# Altium PCB RPD_top.PcbDoc
Units mm, origin at the board's own origin, x right, y up, seen from the top; angles counter-clockwise.
Board outline 100 x 100 mm, 4 copper layers (Top Layer, Internal Plane 1, Internal Plane 2, Bottom Layer), stack 0.462 mm thick; 57 components, 49 nets, 219 pads, 7 vias.
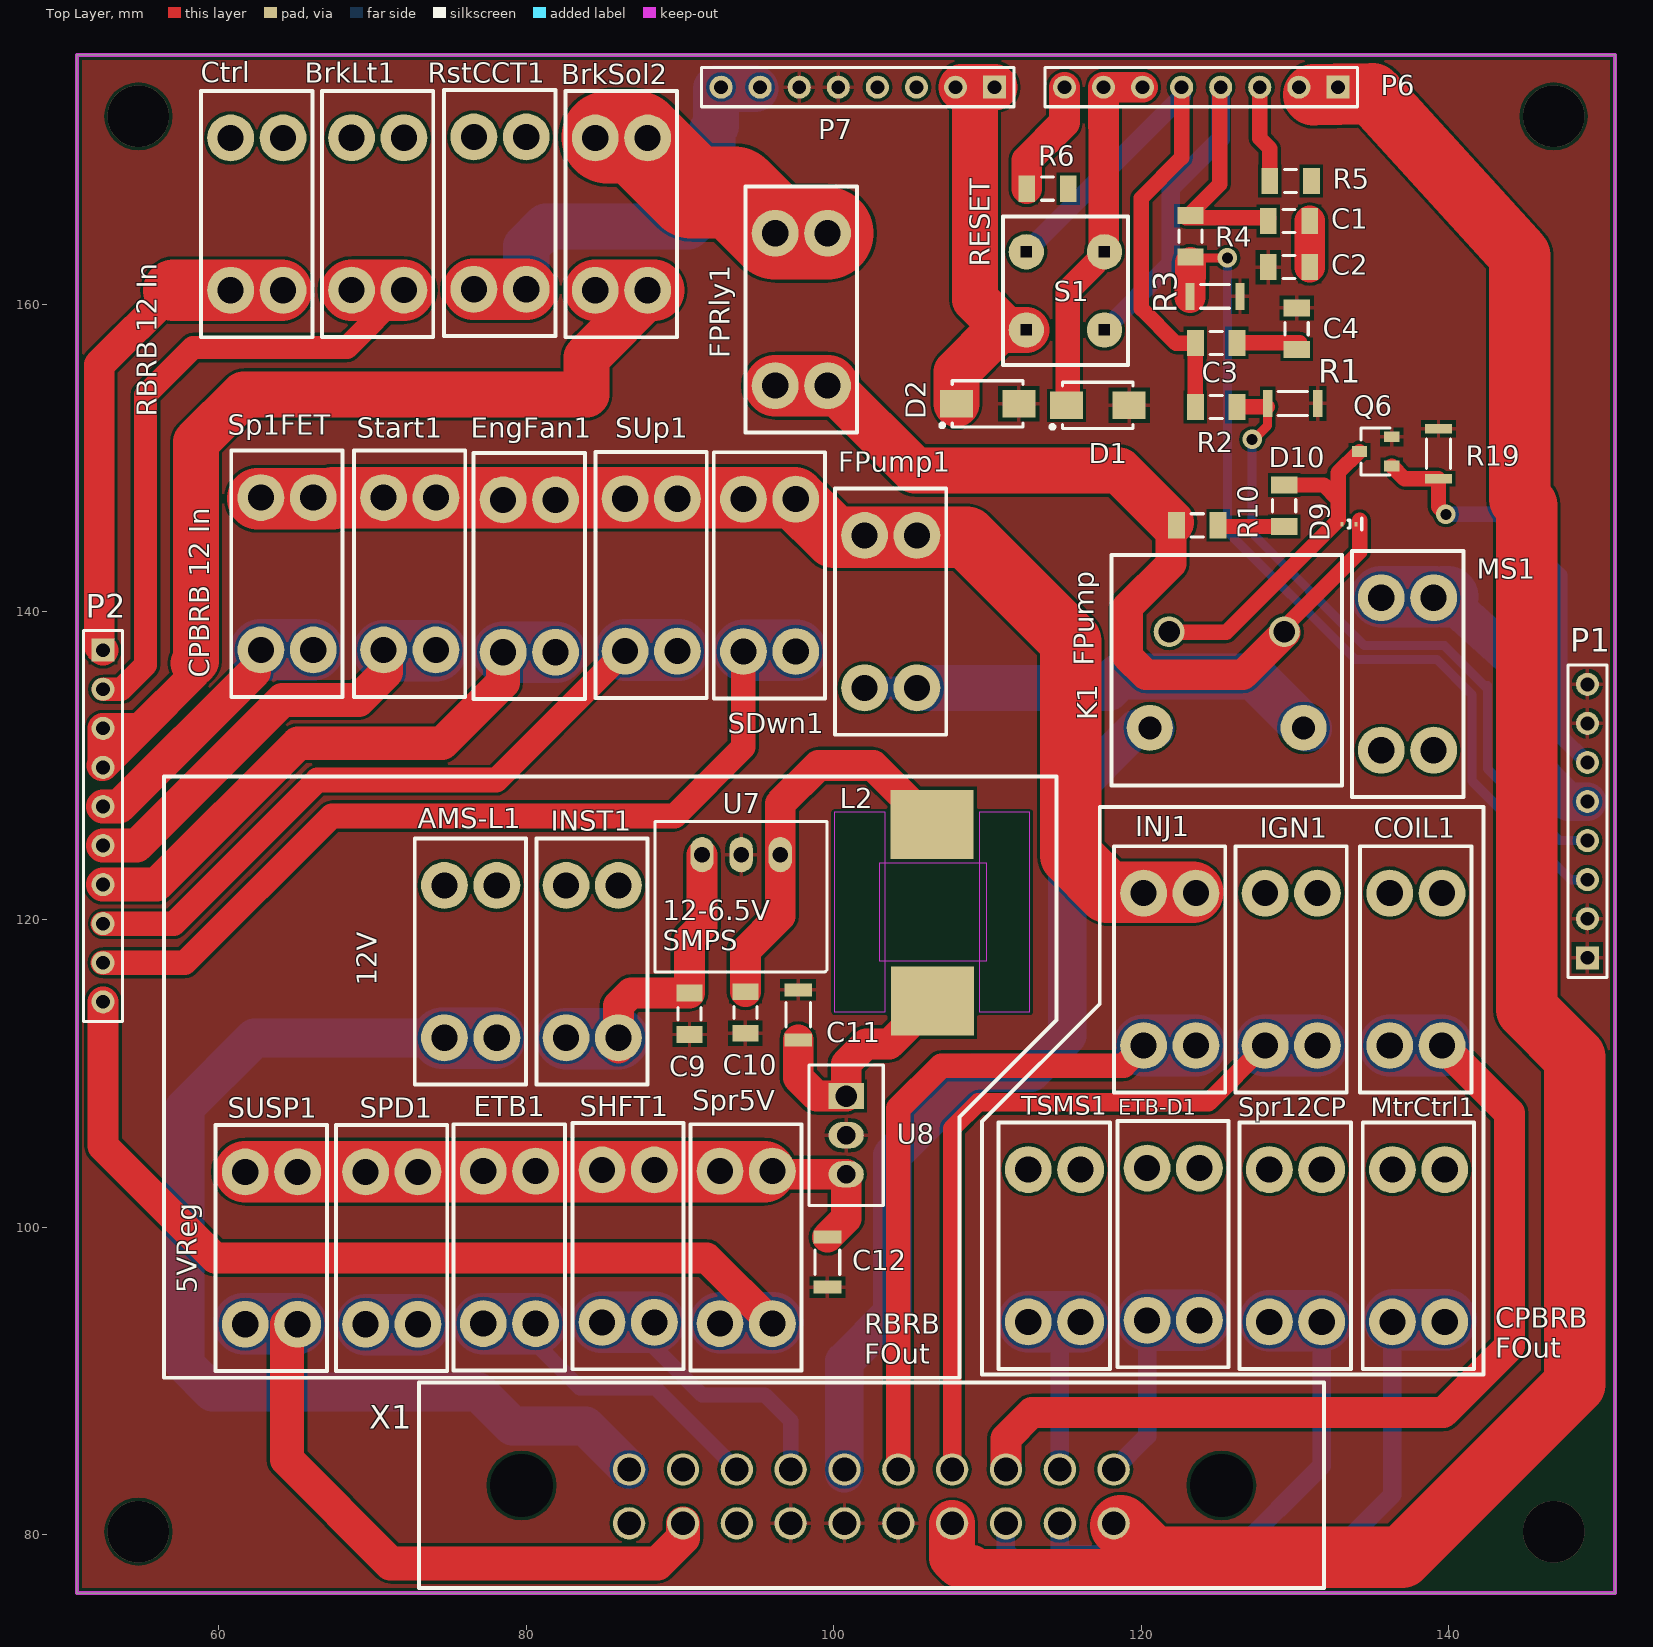
[diagram p0: Top Layer view]
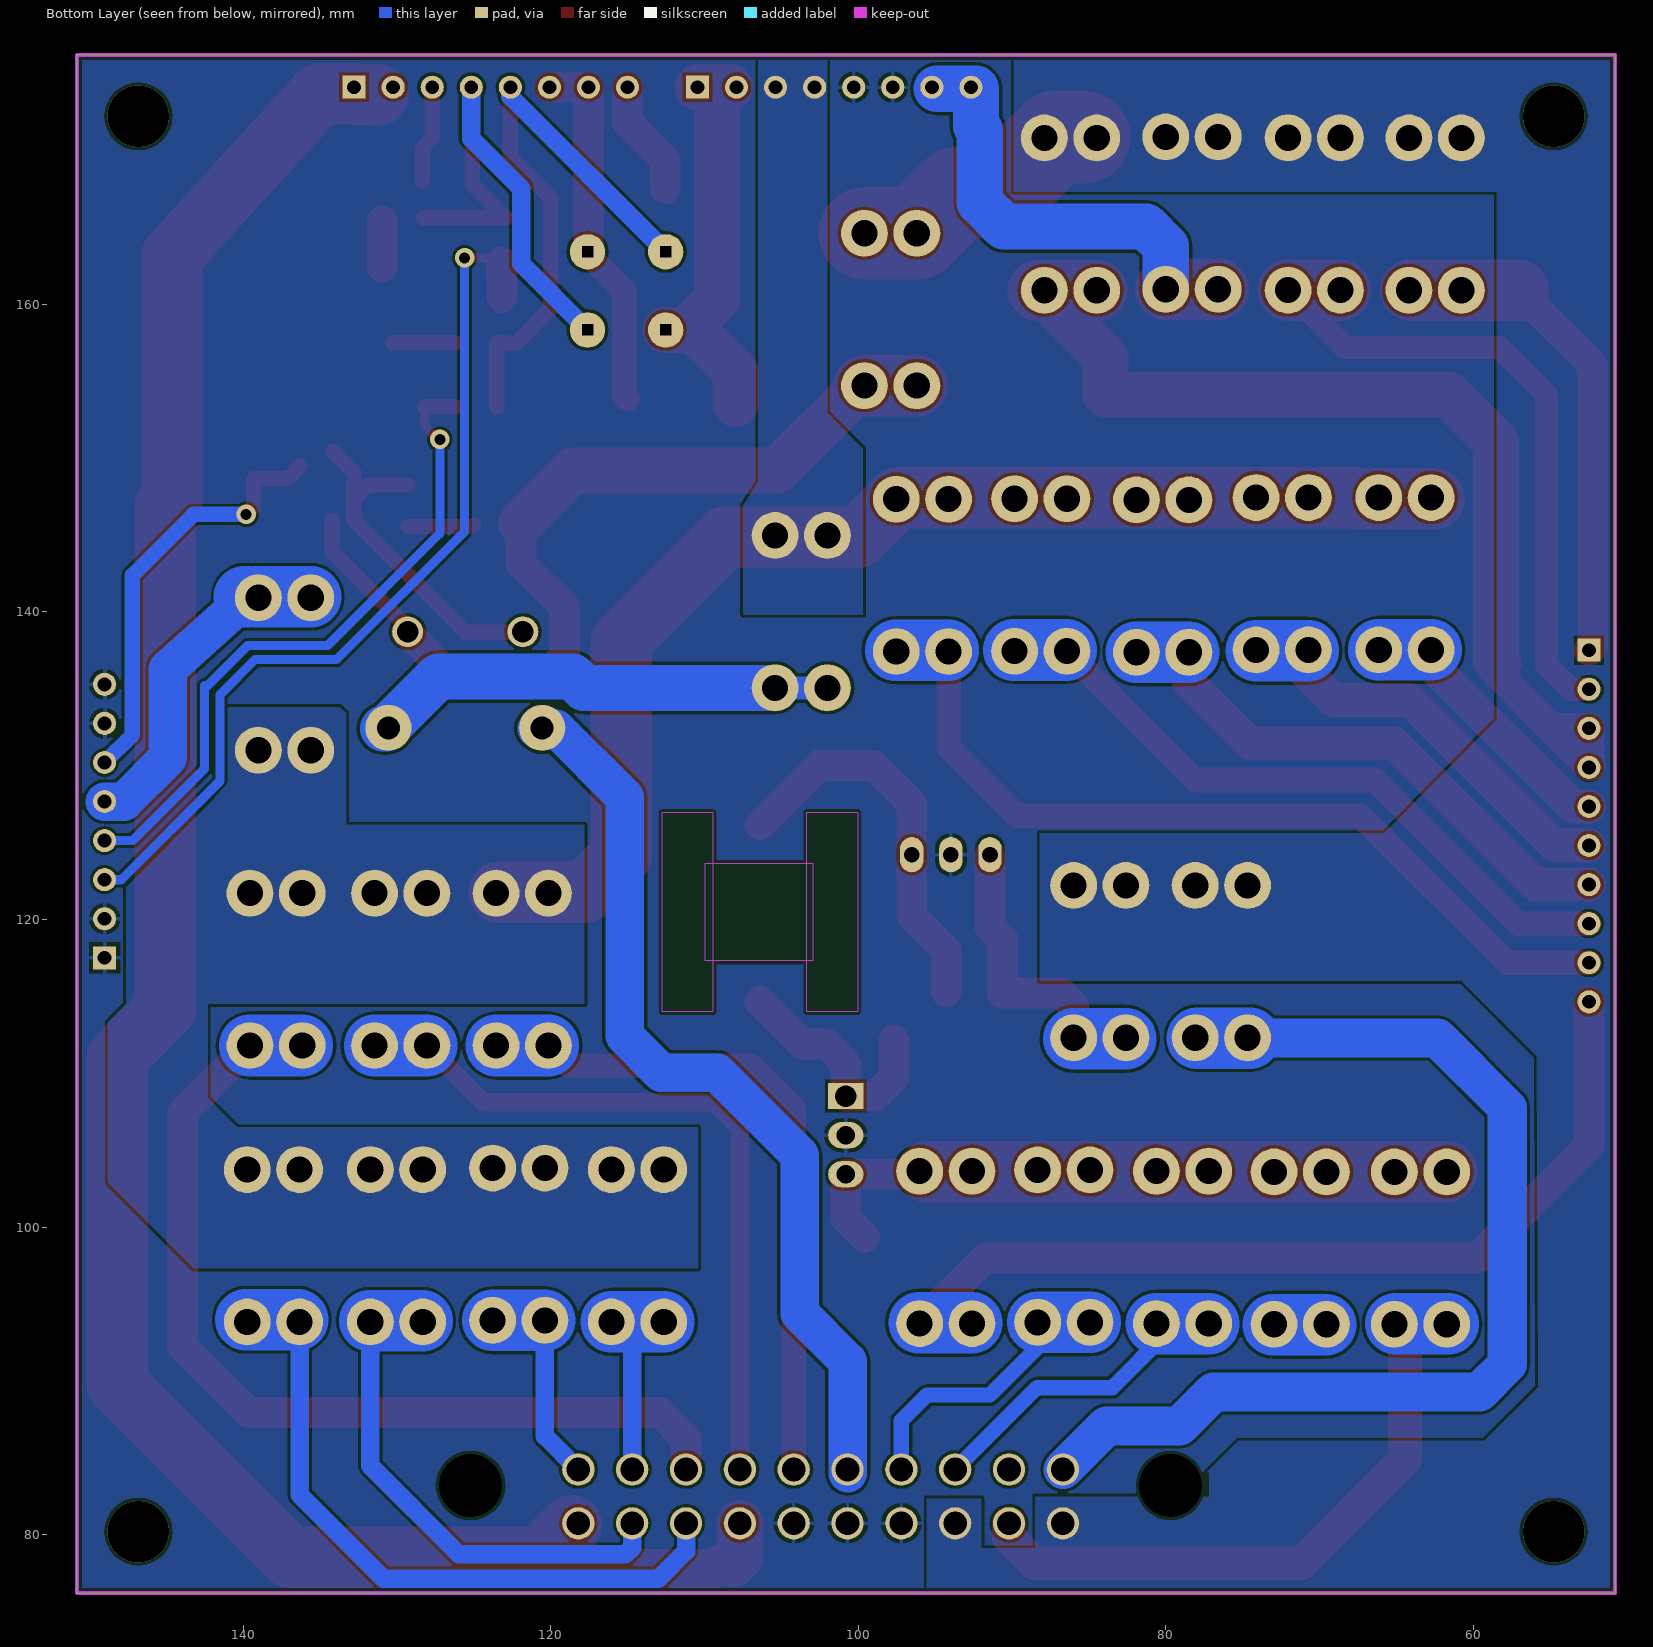
[diagram p1: Bottom Layer view, seen from below]
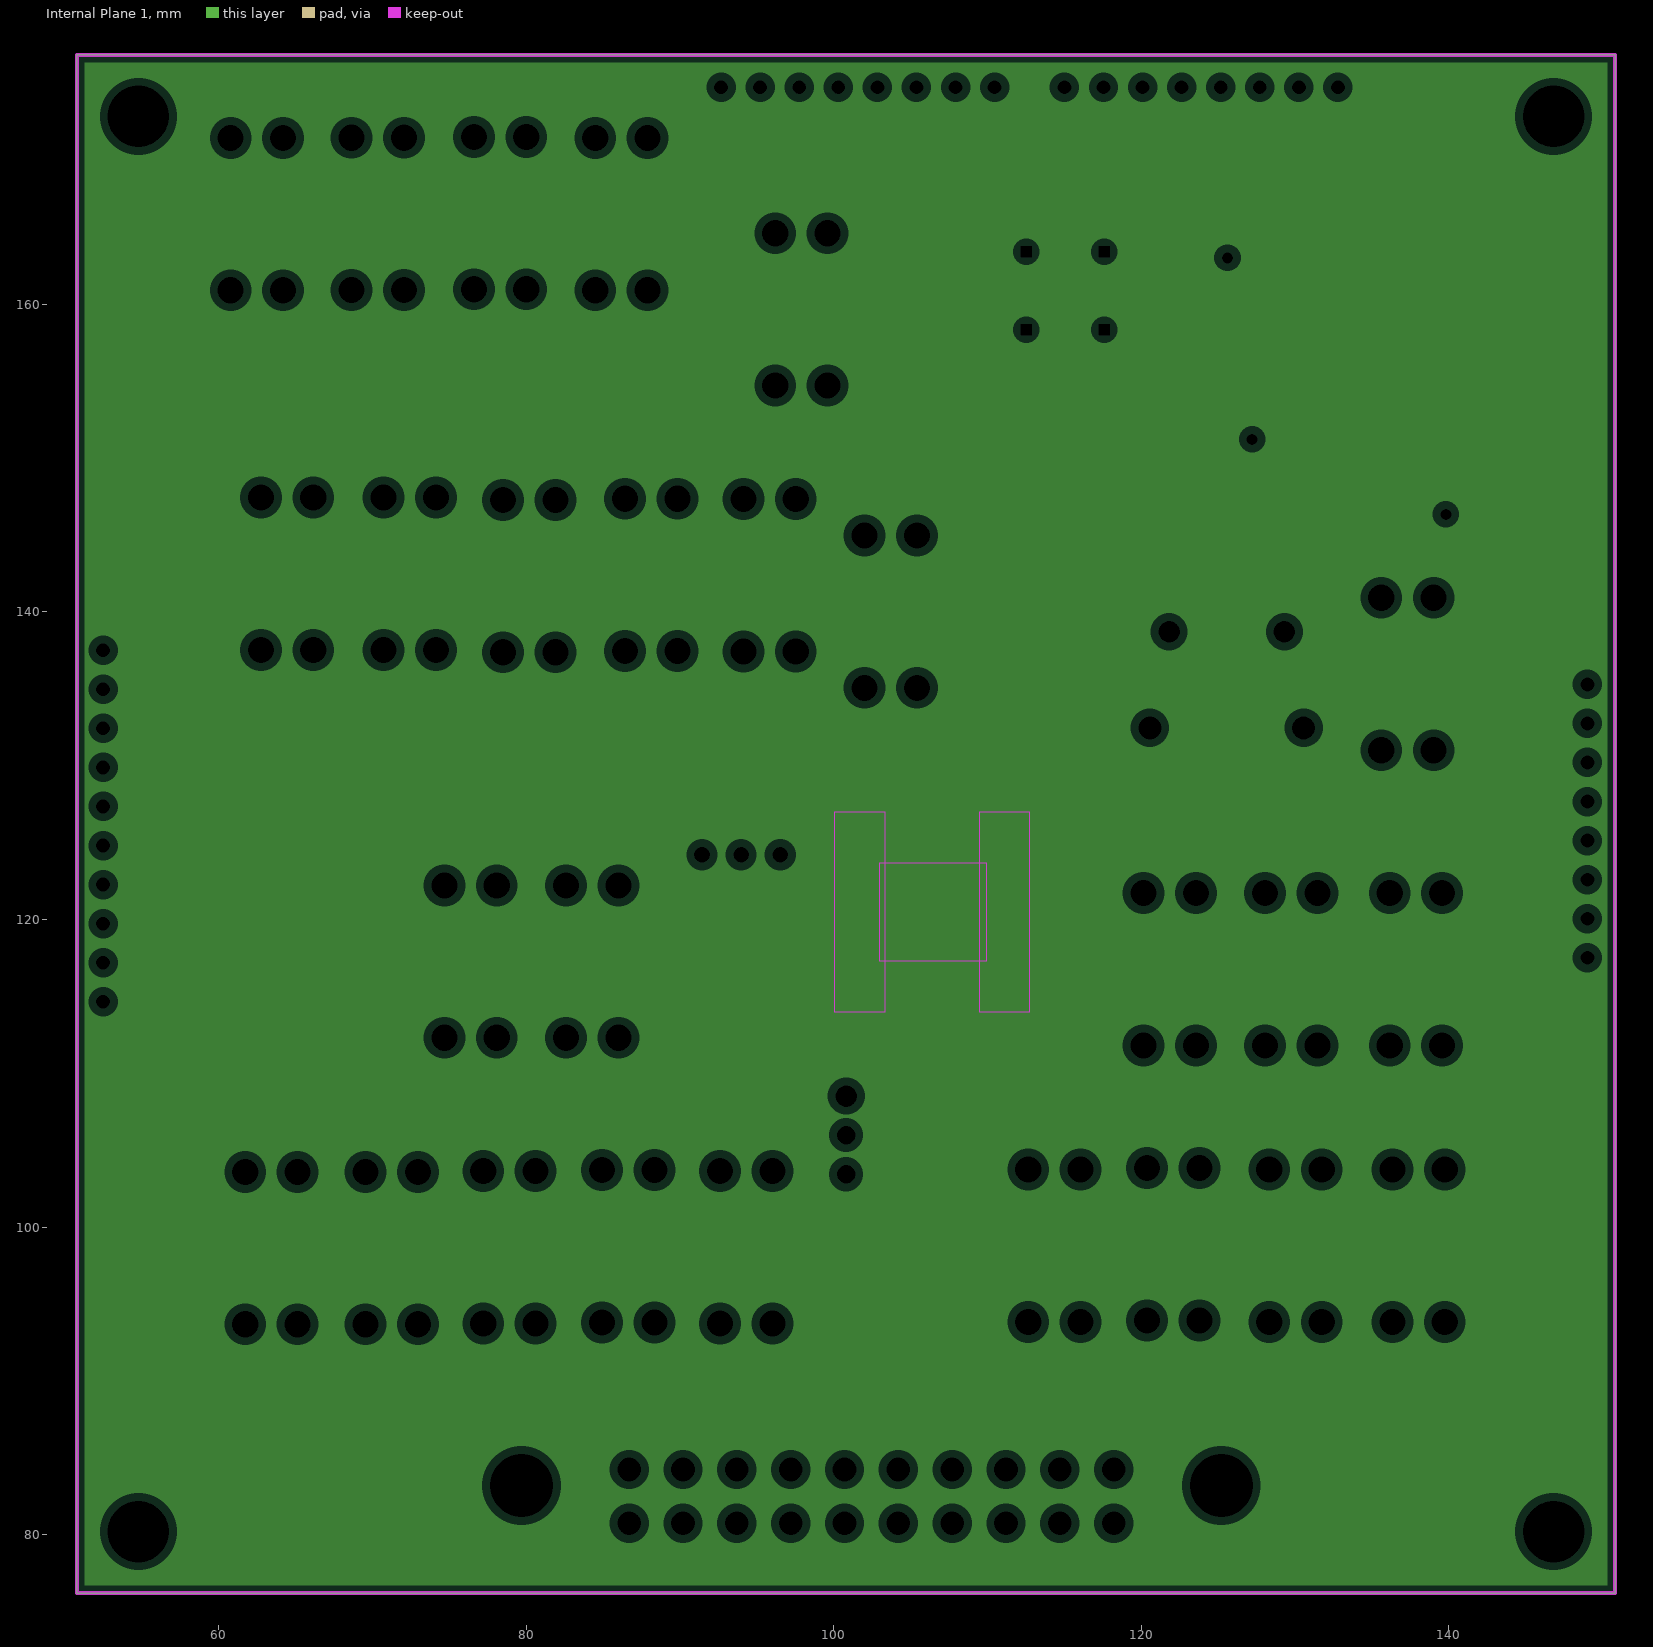
[diagram p2: Internal Plane 1, clearances drawn from the general rule]
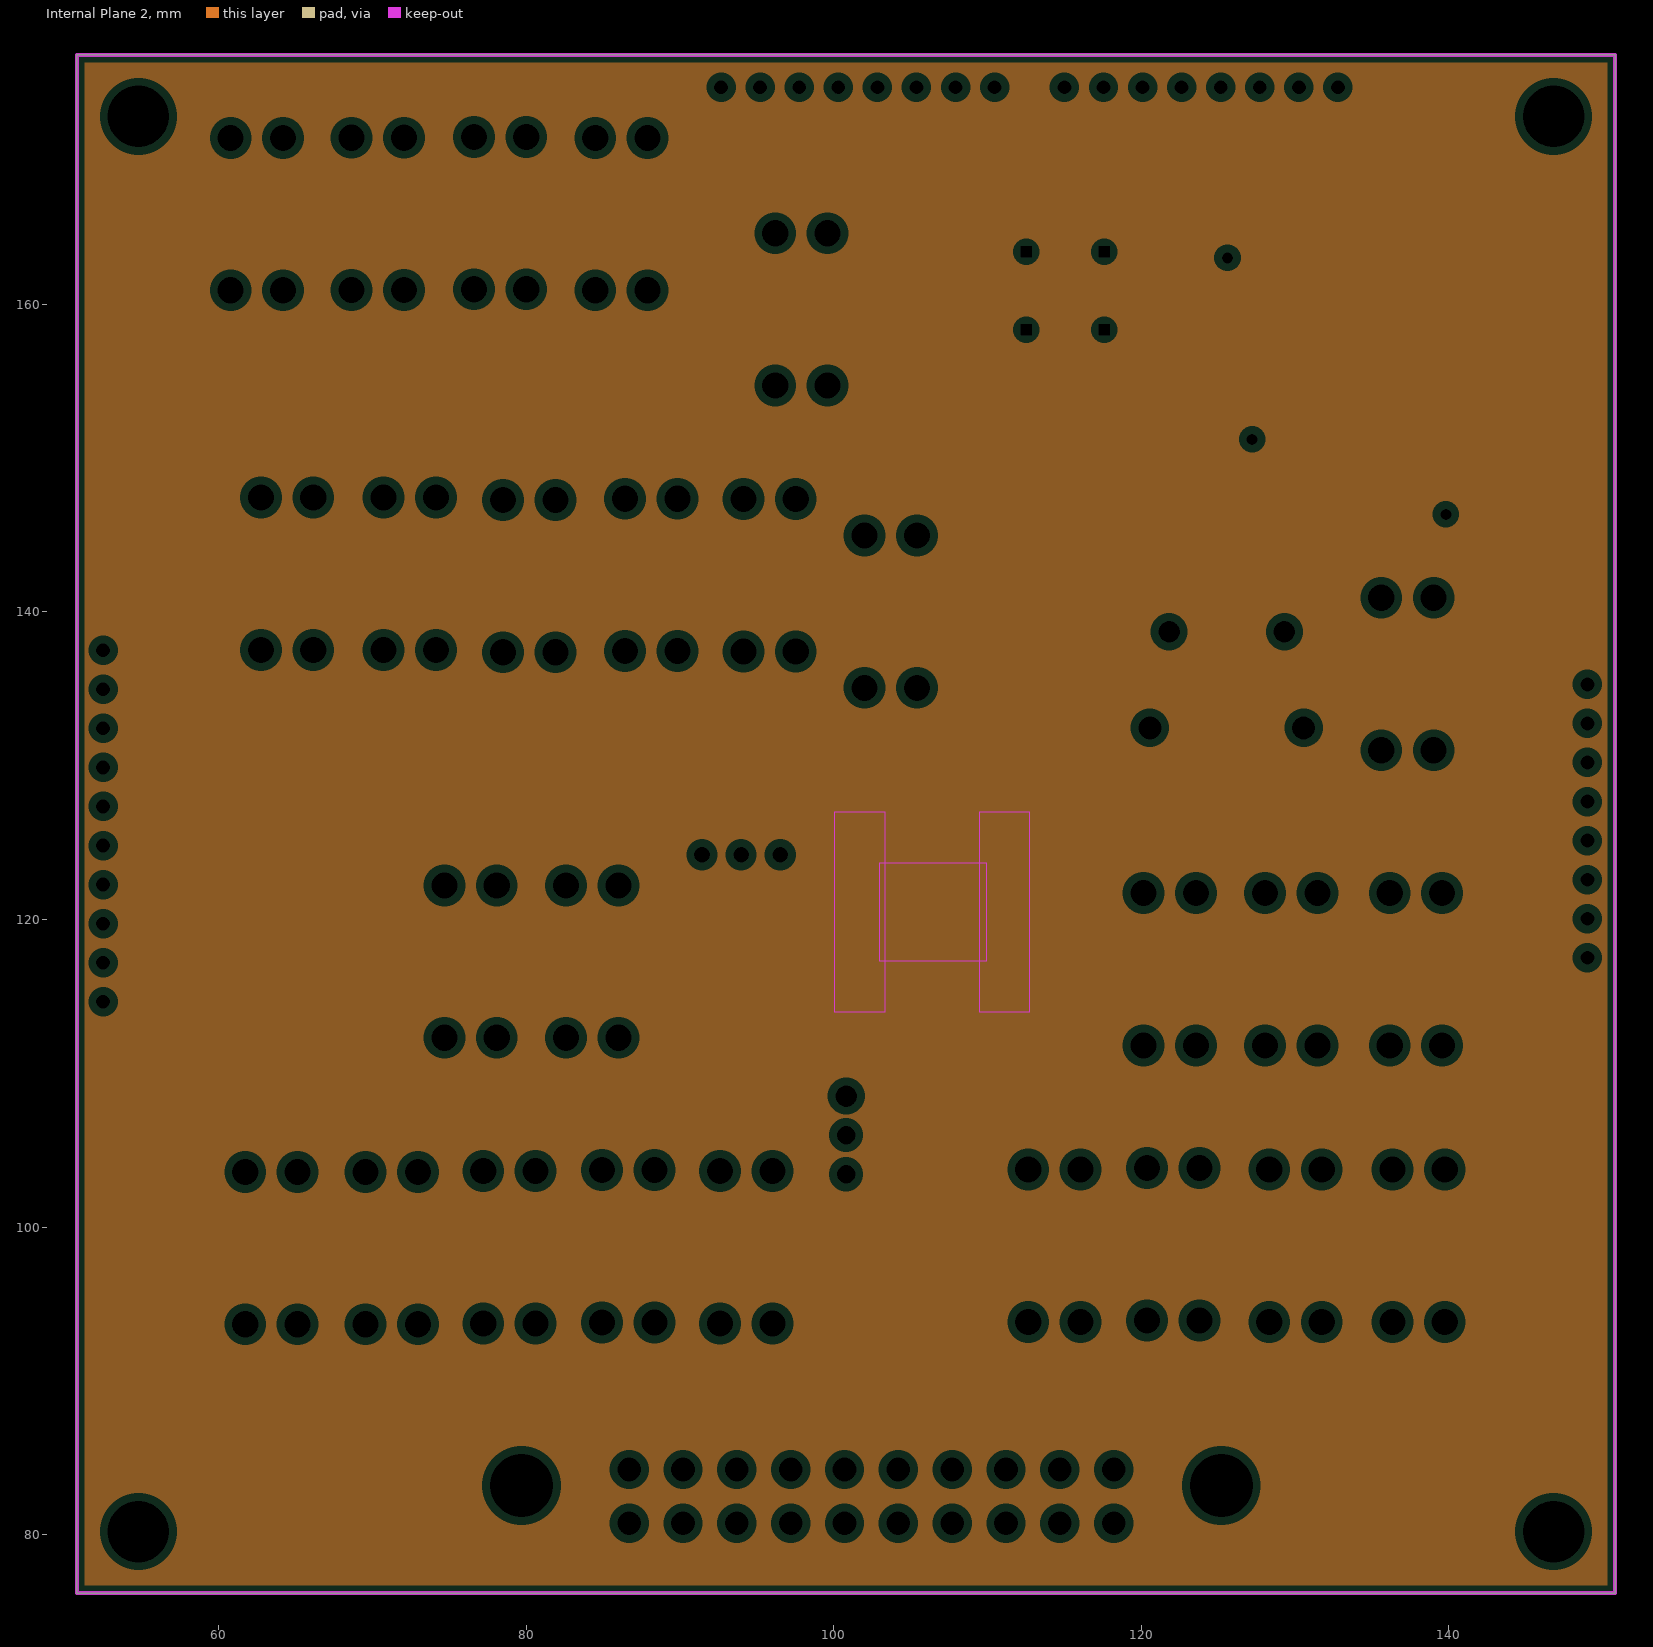
[diagram p3: Internal Plane 2, clearances drawn from the general rule]

## Layer stack, top to bottom
Top Solder: solder mask 0.0102, Solder Resist, Dk 3.5
Top Layer: signal copper 0.0356
Internal Plane 1: plane copper 0.0356
Internal Plane 2: plane copper 0.0356
Dielectric 1: dielectric 0.32, FR-4, Dk 4.8
Bottom Layer: signal copper 0.0356
Bottom Solder: solder mask 0.0102, Solder Resist, Dk 3.5

## Board outline
50.8,76.2 150.8,76.2 150.8,176.2 50.8,176.2

## Design rules (kind name [scope] priority, off if disabled: settings)
Clearance Clearance_1 [All] p1: gap=0.2 ignorepadtopadclearanceinfootprint=FALSE
Clearance [IsRegion vs IsRegion] p2: gap=0.3 ignorepadtopadclearanceinfootprint=FALSE
HoleSize [All] p1: absolutevalues=TRUE maxlimit=5 minlimit=0.025 maxpercent=80.000 minpercent=20.000
MinimumSolderMaskSliver [All] p1: minsoldermaskwidth=0.12
PlaneClearance [All] p1: clearance=0.508
PlaneConnect [All] p1: planeconnectstyle=Relief reliefexpansion=0.508 reliefentries=4 reliefconductorwidth=0.254 reliefairgap=0.254
PolygonConnect PolygonConnect_6 [All vs IsNamedPolygon('Bottom Layer-CPBRB')] p1: thpad.connectstyle=Direct thpad.reliefconductorwidth=0.254 thpad.reliefentries=4 thpad.polygonreliefangle="90 Angle" thpad.airgapwidth=0.254 smdpad.connectstyle=Relief smdpad.reliefconductorwidth=0.254 smdpad.reliefentries=4 smdpad.polygonreliefangle="90 Angle" smdpad.airgapwidth=0.254 via.connectstyle=Relief via.reliefconductorwidth=0.254 via.reliefentries=4 via.polygonreliefangle="90 Angle" via.airgapwidth=0.254
PolygonConnect PolygonConnect_5 [All vs IsNamedPolygon('CPBRB')] p2: thpad.connectstyle=Direct thpad.reliefconductorwidth=0.254 thpad.reliefentries=4 thpad.polygonreliefangle="90 Angle" thpad.airgapwidth=0.254 smdpad.connectstyle=Relief smdpad.reliefconductorwidth=0.254 smdpad.reliefentries=4 smdpad.polygonreliefangle="90 Angle" smdpad.airgapwidth=0.254 via.connectstyle=Relief via.reliefconductorwidth=0.254 via.reliefentries=4 via.polygonreliefangle="90 Angle" via.airgapwidth=0.254
PolygonConnect PolygonConnect_4 [All vs IsNamedPolygon('RBRB')] p3: thpad.connectstyle=Direct thpad.reliefconductorwidth=0.254 thpad.reliefentries=4 thpad.polygonreliefangle="90 Angle" thpad.airgapwidth=0.254 smdpad.connectstyle=Relief smdpad.reliefconductorwidth=0.254 smdpad.reliefentries=4 smdpad.polygonreliefangle="90 Angle" smdpad.airgapwidth=0.254 via.connectstyle=Relief via.reliefconductorwidth=0.254 via.reliefentries=4 via.polygonreliefangle="90 Angle" via.airgapwidth=0.254
PolygonConnect PolygonConnect_3 [All vs IsNamedPolygon('GND')] p4: connectstyle=Relief reliefconductorwidth=0.254 reliefentries=4 polygonreliefangle="90 Angle" airgapwidth=0.254
PolygonConnect PolygonConnect_2 [All] p5: connectstyle=Relief reliefconductorwidth=0.254 reliefentries=4 polygonreliefangle="90 Angle" airgapwidth=0.254
PolygonConnect PolygonConnect_1 [All] p6: connectstyle=Relief reliefconductorwidth=0.254 reliefentries=4 polygonreliefangle="90 Angle" airgapwidth=0.254
PolygonConnect [(InNet('RIGHT BRB'))] p7: connectstyle=Direct reliefconductorwidth=0.254 reliefentries=4 polygonreliefangle="90 Angle" airgapwidth=0.254
RoomDefinition FuelPump [InComponentClass('FuelPump')] p1 off: confinementstyle=ConfineIn formatcopy=TRUE lockcomponents=FALSE outline 0,0 50.8,0 50.8,25.4 0,25.4
RoomDefinition ResetCircuit [InComponentClass('ResetCircuit')] p2 off: confinementstyle=ConfineIn formatcopy=TRUE lockcomponents=FALSE outline 151.892,160.401 220.218,160.401 220.218,204.089 151.892,204.089
RoomDefinition Fusing_Connectors [InComponentClass('Fusing_Connectors')] p3 off: confinementstyle=ConfineIn formatcopy=TRUE lockcomponents=FALSE outline 151.892,77.724 588.01,77.724 588.01,139.7 151.892,139.7
RoutingVias [All] p1: holewidth=0.6 width=1 viastyle="Through Hole" minholewidth=0.711 minwidth=1.27 maxholewidth=0.711 maxwidth=1.27
SilkToSilkClearance [All] p1: silktosilkclearance=0.1
SilkToSolderMaskClearance [IsPad] p1: minsilkscreentomaskgap=0.12 clearancetoexposedcopper=TRUE
SolderMaskExpansion [All] p1: expansion=0.102
Width Width_1 [All] p1: maxlimit=6 minlimit=0.5 preferedwidth=1.2
Width Width_2 [InNet('CPBRB')] p2: maxlimit=4 minlimit=3 preferedwidth=4
Width [InNet('RIGHT BRB')] p3: maxlimit=4 minlimit=3 preferedwidth=4
24 further rules are at their usual default settings.

## Classes and differential pairs
component class Fusing_Connectors: AMS-L1 BrkLt1 BrkSol2 C9 C10 C11 C12 COIL1 Ctrl EngFan1 ETB1 ETB-D1 FPRly1 FPump1 IGN1 INJ1 INST1 L2 MS1 MtrCtrl1 P1 P2 RstCCT1 SDwn1 SHFT1 Sp1FET SPD1 Spr5V Spr12CP Start1 SUp1 SUSP1 TSMS1 U7 U8 X1
component class FuelPump: D9 D10 K1 Q6 R10 R19
component class ResetCircuit: C1 C2 C3 C4 D1 D2 P6 P7 R1 R2 R3 R4 R5 R6 S1

## Components (designator, comment, footprint, x,y, rotation, side; value= is the part's Value field where it differs from the comment)
AMS-L1 "Fuse 2" "Fuse Holder Mini ATC/ATO"#1 78.1,112.3 r90 top
BrkLt1 "Fuse 2" "FUSE HOLDER MINI ATC/ATO" 72.06,160.909 r90 top
BrkSol2 "Fuse 2" "FUSE HOLDER MINI ATC/ATO" 87.904,160.894 r90 top
C1 "Cap" C1206 129.6,165.4 r180 top value=47uF
C2 "Cap" C1206 129.6,162.4 r0 top value=47uF
C3 "Cap" C1206 124.866,157.48 r180 top value=47uF
C4 "Cap" C1206 130.1,158.4 r270 top value=47uF
C9 "Cap2" C1206 90.627,113.868 r270 top value=10uF
C10 "Cap2" C1206 94.259,113.944 r270 top value=10uF
C11 "Cap2" 1206 97.688,113.792 r90 top value=22uF
C12 "Cap2" 1206 99.593,97.714 r270 top value=22uF
COIL1 "Fuse 4A" "Fuse Holder Mini ATC/ATO"#1 139.55,111.8 r90 top
Ctrl "Fuse 2" "FUSE HOLDER MINI ATC/ATO" 64.2,160.894 r90 top
D1 "Flyback" "DO-214AC, SMA" 117.17,153.416 r180 top
D2 "Flyback" "DO-214AC, SMA" 110.007,153.518 r180 top
D9 "Diode" 1SS413 133.945,145.694 r90 top
D10 "LED0" C1206 129.286,146.888 r90 top
EngFan1 "Fuse 2" "FUSE HOLDER MINI ATC/ATO" 81.915,137.363 r90 top
ETB1 "Fuse 2" "Fuse Holder Mini ATC/ATO"#1 80.62,93.726 r90 top
ETB-D1 "Fuse 5A" "Fuse Holder Mini ATC/ATO"#1 123.774,93.929 r90 top
FPRly1 "Fuse 2" "FUSE HOLDER MINI ATC/ATO" 99.6,154.7 r90 top
FPump1 "Fuse 2" "FUSE HOLDER MINI ATC/ATO" 105.41,135.052 r90 top
IGN1 "Fuse 10A" "Fuse Holder Mini ATC/ATO"#1 131.45,111.8 r90 top
INJ1 "Fuse 4A" "Fuse Holder Mini ATC/ATO"#1 123.55,111.8 r90 top
INST1 "Fuse 2" "Fuse Holder Mini ATC/ATO"#1 86.004,112.3 r90 top
K1 "Relay-SPST" PB114012 125.55,133.7 r270 top
L2 "Inductor" "FILTER INDUCTOR" 106.401,125.425 r0 top value=20uH
MS1 "Fuse 2" "FUSE HOLDER MINI ATC/ATO" 135.6,140.906 r270 top
MtrCtrl1 "Fuse 2A" "Fuse Holder Mini ATC/ATO"#1 139.725,93.828 r90 top
P1 "Header 8" HDR1X8 149,117.5 r90 top locked
P2 "Header 10" HDR1X10 52.5,137.5 r270 top locked
P6 "Header 8" HDR1X8 132.78,174.1 r180 top
P7 "Header 8" HDR1X8 110.46,174.1 r180 top
Q6 "MOSFET-N" SOT23f 135.23,150.419 r180 top
R1 "1206" "1206 (High Density)" 129.845,153.543 r180 top value=1M
R2 "Res1" C1206 124.866,153.314 r0 top value=100K
R3 "1206" "1206 (High Density)" 124.79,160.503 r180 top value=1M
R4 "Res1" C1206 123.2,164.4 r270 top value=100K
R5 "Blue LED Resistor" C1206 129.7,168 r180 top value=453R
R6 "Red LED Resistor" C1206 113.9,167.5 r180 top value=453R
R10 "1206" C1206 123.643,145.618 r0 top value=500
R19 "1206" "1206 (High Density)" 139.319,150.266 r270 top value=1M
RstCCT1 "Fuse 2" "FUSE HOLDER MINI ATC/ATO" 80.01,160.96 r90 top
S1 "SW-DP-PB" SW-DP-PB 115.062,160.858 r90 top
SDwn1 "Fuse 2" "FUSE HOLDER MINI ATC/ATO" 97.536,137.414 r90 top
SHFT1 "Fuse 2" "FUSE HOLDER MINI ATC/ATO" 88.341,93.802 r90 top
Sp1FET "Fuse 2" "FUSE HOLDER MINI ATC/ATO" 66.167,137.516 r90 top
SPD1 "Fuse 2" "Fuse Holder Mini ATC/ATO"#1 72.974,93.675 r90 top
Spr5V "Fuse 2" "Fuse Holder Mini ATC/ATO"#2 96.012,93.726 r90 top
Spr12CP "Fuse 2" "Fuse Holder Mini ATC/ATO"#1 131.724,93.828 r90 top
Start1 "Fuse 2" "FUSE HOLDER MINI ATC/ATO" 74.143,137.516 r90 top
SUp1 "Fuse 2" "FUSE HOLDER MINI ATC/ATO" 89.84,137.439 r90 top
SUSP1 "Fuse 2" "Fuse Holder Mini ATC/ATO"#1 65.151,93.675 r90 top
TSMS1 "AMS contactor side 7.5A" "Fuse Holder Mini ATC/ATO"#1 116.053,93.828 r90 top
U7 "6.5V SMPS" V7806-1000 93.98,124.206 r0 top
U8 "5V LIN REG" TO-220-3 100.813,105.969 r270 top
X1 "MX150-20" "20 Pin MX150" 79.7,83.2 r0 top locked

## Footprints (in the part's own frame and the unit in brackets; to place one, negate y for a bottom-side part, rotate by r counter-clockwise, add the part's x,y. Pads: shape width x height; smd on the part's side, far side on the other; paste and mask are expansions set on the pad)
1SS413 [mm] "2-SMD DIODE FOR RELAY COIL FLYBACK"
  rect 0.3x0.2 smd: 1(0,0.9) 2(0,0)
  silkscreen extent -0.38,-0.38 0.38,0.51
"20 Pin MX150" [mm]
  round 2.1 hole 1.54: 1(7,1.04) 2(10.5,1.04) 3(14,1.04) 4(17.5,1.04) 5(21,1.04) 6(24.5,1.04) 7(28,1.04) 8(31.5,1.04) 9(35,1.04) 10(38.5,1.04) 11(7,-2.46) 12(10.5,-2.46) 13(14,-2.46) 14(17.5,-2.46) 15(21,-2.46) 16(24.5,-2.46) 17(28,-2.46) 18(31.5,-2.46) 19(35,-2.46) 20(38.5,-2.46)
  round 0 hole 4.1 unplated: 30(0,0) 31(45.5,0)
  silkscreen extent -6.67,-6.68 52.17,6.68
1206 [mm] "Chip Capacitor, 2-Leads, Body 3.20x1.60mm, IPC Medium Density"
  rect 0.85x1.8 smd: 1(-1.625,0) 2(1.625,0)
  silkscreen extent -0.8,-0.8 0.8,0.8, body extent -1.7,-0.9 1.7,0.9, height 0.6
"1206 (High Density)" [mm] "Panasonic 1206 Resistor"
  rect 0.6x1.75 smd: 1(-1.625,0) 2(1.625,0)
  silkscreen extent -0.95,-0.77 0.95,0.77, body extent -1.5,-0.72 1.5,0.72, height 0.7
C1206 [mm] "Chip Capacitor, Body 3.2x1.6mm, IPC High Density"
  rect 1.1x1.7 smd: 1(-1.35,0) 2(1.35,0)
  silkscreen extent -0.4,-0.75 0.4,0.75, body extent -1.7,-0.9 1.7,0.9, height 1.3
"DO-214AC, SMA" [mil]
  rect 85x70 smd: 1(-80,0) 2(80,0)
  silkscreen extent -91,-59 121,60, body extent -91,-57 91,57, height 96
"FILTER INDUCTOR" [mm]
  rect 5.4x4.5 smd: 1(0,0.74) 2(0.01,-10.73)
  Keep-Out Layer region: -3.429,-8.128 3.556,-8.128 3.556,-1.778 -3.429,-1.778
  Keep-Out Layer region: 3.048,-11.43 6.35,-11.43 6.35,1.524 3.048,1.524
  Keep-Out Layer region: -6.35,-11.43 -3.048,-11.43 -3.048,1.524 -6.35,1.524
"Fuse Holder Mini ATC/ATO"#1 [mil] "BK-6010"
  round 120 hole 67: 1(0,134) 1(0,0) 2(390,0) 2(390,134)
  silkscreen extent -120,-75 510,210, body extent -120,-75 510,210, height 290
"Fuse Holder Mini ATC/ATO"#2 [mil] "BK-6010"
  round 120 hole 67: 1(0,134) 1(0,0) 2(390,134)
  round 120 hole 67 mask+4: 2(390,0)
  silkscreen extent -120,-75 510,210, body extent -120,-75 510,210, height 290
"FUSE HOLDER MINI ATC/ATO" [mil] "BK-6010"
  round 120 hole 67: 1(0,134) 1(0,0) 2(390,0) 2(390,134)
  silkscreen extent -120,-75 510,210, body extent -120,-75 510,210, height 290
HDR1X8 [mm] "Connector; Header; 8 Position"
  rect 1.5x1.5 hole 0.9: 1(0,0)
  round 1.5 hole 0.9: 2(2.54,0) 3(5.08,0) 4(7.62,0) 5(10.16,0) 6(12.7,0) 7(15.24,0) 8(17.78,0)
  silkscreen extent -1.27,-1.27 19.05,1.27
HDR1X10 [mm] "Connector; Header; 10 Position"
  rect 1.5x1.5 hole 0.9: 1(0,0)
  round 1.5 hole 0.9: 2(2.54,0) 3(5.08,0) 4(7.62,0) 5(10.16,0) 6(12.7,0) 7(15.24,0) 8(17.78,0) 9(20.32,0) 10(22.86,0)
  silkscreen extent -1.27,-1.27 24.13,1.27
PB114012 [mm] "Relay"
  round 3 hole 1.5: 1(1.25,5) 2(1.25,-5)
  round 2 hole 1.4: 3(-5,3.75) 4(-5,-3.75)
  silkscreen extent -10,-7.5 5,7.5
SOT23f [mm] "SOT23, 3-Leads, Body 2.90x2.40mm, Pitch 0.95mm, IPC Medium Density"
  rect 1x0.7 smd: 1(1.05,0) 2(-1.05,0.95) 3(-1.05,-0.95)
  silkscreen extent -0.92,-1.52 0.95,1.52
SW-DP-PB [mm] "Double Pole Push Button for Reset Circuit"
  round 2.3 hole 0.711 square: 1(2.54,-2.54) 3(2.54,2.54) 4(-2.54,-2.54) 6(-2.54,2.54)
  silkscreen extent -4.83,-4.06 4.83,4.06
TO-220-3 [mm] "LM2940CT 5V LINEAR REG"
  rect 1.7x2.286 hole 1.4: 1(-2.54,0)
  oval 1.7x2.286 hole 1.2: 2(0,0) 3(2.54,0)
  silkscreen extent -4.57,-2.41 4.57,2.41
V7806-1000 [mil] "6.5V output SMPS"
  oval 60x90 hole 40: 1(-100,0) 2(0,0) 3(100,0)
  silkscreen extent -220,-300 220,85

## Part data
AMS-L1 BrkLt1 BrkSol2 Ctrl EngFan1 ETB1 FPump1 INST1 RstCCT1 SDwn1 SHFT1 Sp1FET SPD1 Spr5V Start1 SUp1 SUSP1: "Fuse", Supplier Part Number 1=36-3568-ND, LatestRevisionDate=17-Jul-2002, LatestRevisionNote="Re-released for DXP Platform.", PackageDescription="Thru-Hole; 2 Leads", PackageReference=PIN-W2/E2.8, Published=8-Jun-2000, Publisher="Altium Limited", Supplier 1=Digi-Key
  AMS-L1 ETB1 INST1 SHFT1 SPD1 Spr5V SUSP1: Supplier 2=Digi-Key
C1 C2 C3 C4: "Capacitor", Supplier Part Number 1=587-5425-1-ND, LatestRevisionDate=17-Jul-2002, LatestRevisionNote="Re-released for DXP Platform.", PackageDescription="Radial Cap, Thru-Hole; 2 Leads; 0.3 in Pin Spacing", PackageReference=RAD-0.3, Published=8-Jun-2000, Publisher="Altium Limited"
  C3 C4: Supplier 1=Digikey
C9: "Capacitor. Ceramic 10uF 50V rating recommended, place close to pin", Supplier Part Number 1=478-8496-1-ND, PackageDescription="Capacitor; 2 Leads", PackageReference=CAPR5-4X5, Published=23-Sep-2002, Publisher="Altium Limited", Supplier 1=Digi-Key
C10: "Capacitor. Ceramic 10uF 16V recommended. place close to pin", Supplier Part Number 1=478-8496-1-ND, PackageDescription="Capacitor; 2 Leads", PackageReference=CAPR5-4X5, Published=23-Sep-2002, Publisher="Altium Limited", Supplier 1=Digi-Key
C11 C12: "Capacitor", Supplier Part Number 1=478-8468-1-ND, PackageDescription="Capacitor; 2 Leads", PackageReference=CAPR5-4X5, Published=23-Sep-2002, Publisher="Altium Limited", Supplier 1=Digi-Key
COIL1: library part "Fuse 2", "Fuse Ignition Coil 4A", Supplier Part Number 1=36-3568-ND, LatestRevisionDate=17-Jul-2002, LatestRevisionNote="Re-released for DXP Platform.", PackageDescription="Thru-Hole; 2 Leads", PackageReference=PIN-W2/E2.8, Published=8-Jun-2000, Publisher="Altium Limited", Supplier 1=Digi-Key, Supplier 2=Digi-Key
D1 D2: library part Diode, "Default Diode", Supplier Part Number 1=B160-FDICT-ND, Code_JEDEC=DO-214-AB, LatestRevisionDate=17-Jul-2002, LatestRevisionNote="Re-released for DXP Platform.", PackageDescription="DO-214-AB/SMC; 2 C-Bend Leads; Body 7.9 x 5.9 mm, inc. leads (LxW)", PackageReference=SMC, PackageVersion=Sep-1996, Published=8-Jun-2000, Publisher="Altium Limited", Supplier 1=Digi-Key
D9: "Switching diode", Supplier Part Number 1=1SS413L3FCT-ND, Code_JEDEC=DO-214-AB, LatestRevisionDate=17-Jul-2002, LatestRevisionNote="Re-released for DXP Platform.", PackageDescription="DO-214-AB/SMC; 2 C-Bend Leads; Body 7.9 x 5.9 mm, inc. leads (LxW)", PackageReference=SMC, PackageVersion=Sep-1996, Published=8-Jun-2000, Publisher="Altium Limited", Supplier 1=Digi-Key
D10: "Typical INFRARED GaAs LED", Supplier Part Number 1=1516-1172-1-ND, LatestRevisionDate=08-Jul-2005, LatestRevisionNote="Mech Layer 1 removed.", PackageDescription="LED; 2 Leads", PackageReference=LED-0, Published=8-Jun-2000, Publisher="Altium Limited", Supplier 1=Digi-Key
ETB-D1: library part "Fuse 2", "Fuse 5A ETB driver", Supplier Part Number 1=36-3568-ND, LatestRevisionDate=17-Jul-2002, LatestRevisionNote="Re-released for DXP Platform.", PackageDescription="Thru-Hole; 2 Leads", PackageReference=PIN-W2/E2.8, Published=8-Jun-2000, Publisher="Altium Limited", Supplier 1=Digi-Key, Supplier 2=Digi-Key
FPRly1: "Fuse Relay Coils", Supplier Part Number 1=36-3568-ND, LatestRevisionDate=17-Jul-2002, LatestRevisionNote="Re-released for DXP Platform.", PackageDescription="Thru-Hole; 2 Leads", PackageReference=PIN-W2/E2.8, Published=8-Jun-2000, Publisher="Altium Limited", Supplier 1=Digi-Key
IGN1: library part "Fuse 2", "Fuse 10A ignition", Supplier Part Number 1=36-3568-ND, LatestRevisionDate=17-Jul-2002, LatestRevisionNote="Re-released for DXP Platform.", PackageDescription="Thru-Hole; 2 Leads", PackageReference=PIN-W2/E2.8, Published=8-Jun-2000, Publisher="Altium Limited", Supplier 1=Digi-Key, Supplier 2=Digi-Key
INJ1: library part "Fuse 2", Supplier Part Number 1=36-3568-ND, LatestRevisionDate=17-Jul-2002, LatestRevisionNote="Re-released for DXP Platform.", PackageDescription="Thru-Hole; 2 Leads", PackageReference=PIN-W2/E2.8, Published=8-Jun-2000, Publisher="Altium Limited", Supplier 1=Digi-Key, Supplier 2=Digi-Key
K1: "Single-Pole Single-Throw Relay", Supplier Part Number 1=PB768-ND, LatestRevisionDate=17-Jul-2002, LatestRevisionNote="Re-released for DXP Platform.", PackageReference=MODULE4, Published=24-Mar-1999, Publisher="Altium Limited", Supplier 1=Digi-Key
L2: Supplier Part Number 1=732-1242-1-ND, Code_IEC=1005, Code_JEITA=0402, LatestRevisionDate=29-May-2009, LatestRevisionNote="IPC-7351 Footprint Added.", PackageDescription="Chip Inductor", PackageReference=0402-A, Published=8-Jun-2000, Publisher="Altium Limited", Supplier 1=Digi-Key
MS1: "Microsquirt fuse", Supplier Part Number 1=36-3568-ND, LatestRevisionDate=17-Jul-2002, LatestRevisionNote="Re-released for DXP Platform.", PackageDescription="Thru-Hole; 2 Leads", PackageReference=PIN-W2/E2.8, Published=8-Jun-2000, Publisher="Altium Limited", Supplier 1=Digi-Key
MtrCtrl1: library part "Fuse 2", "Fuse 2A Motor Controller", Supplier Part Number 1=36-3568-ND, LatestRevisionDate=17-Jul-2002, LatestRevisionNote="Re-released for DXP Platform.", PackageDescription="Thru-Hole; 2 Leads", PackageReference=PIN-W2/E2.8, Published=8-Jun-2000, Publisher="Altium Limited", Supplier 1=Digi-Key, Supplier 2=Digi-Key
P1: "Header, 8-Pin", Supplier Part Number 1=952-2121-ND, LatestRevisionDate=17-Jul-2002, LatestRevisionNote="Re-released for DXP Platform.", Publisher="Altium Limited", Supplier 1=Digi-Key
P2: "Header, 10-Pin", Supplier Part Number 1=952-2121-ND, LatestRevisionDate=17-Jul-2002, LatestRevisionNote="Re-released for DXP Platform.", Publisher="Altium Limited"
P6: "Header, 8-Pin, A98338-ND", Supplier Part Number 1=A98338-ND, LatestRevisionDate=17-Jul-2002, LatestRevisionNote="Re-released for DXP Platform.", Publisher="Altium Limited", Supplier 1=Digikey
P7: "Header, 8-Pin A98338-ND", Supplier Part Number 1=A98338-ND, LatestRevisionDate=17-Jul-2002, LatestRevisionNote="Re-released for DXP Platform.", Publisher="Altium Limited", Supplier 1=Digikey
Q6: "N-Channel MOSFET", Supplier Part Number 1=SSM3K329RLFCT-ND, LatestRevisionDate=17-Jul-2002, LatestRevisionNote="Re-released for DXP Platform.", PackageDescription="TO, Flat Index; 3 In-Line, Axial Leads; Body Dia. 4.6mm; Lead Dia. 0.5 mm (max)", PackageReference=E3, PackageVersion=1995/1996, Published=8-Jun-2000, Publisher="Altium Limited", Supplier 1=Digi-Key
R1 R3: library part Res1, "Resistor", Supplier Part Number 1=RG32P1.0MBCT-ND, LatestRevisionDate=17-Jul-2002, LatestRevisionNote="Re-released for DXP Platform.", PackageDescription="Axial Device, Thru-Hole; 2 Leads; 0.3 in Pin Spacing", PackageReference=AXIAL-0.3, Published=8-Jun-2000, Publisher="Altium Limited", Supplier 1=Digi-Key
R2 R4: "Resistor", Supplier Part Number 1=P100KBCCT-ND, LatestRevisionDate=17-Jul-2002, LatestRevisionNote="Re-released for DXP Platform.", PackageDescription="Axial Device, Thru-Hole; 2 Leads; 0.3 in Pin Spacing", PackageReference=AXIAL-0.3, Published=8-Jun-2000, Publisher="Altium Limited"
R5 R6: library part Res1, "Resistor", Supplier Part Number 1=RNCF1206BKE453RCT-ND, LatestRevisionDate=17-Jul-2002, LatestRevisionNote="Re-released for DXP Platform.", PackageDescription="Axial Device, Thru-Hole; 2 Leads; 0.3 in Pin Spacing", PackageReference=AXIAL-0.3, Published=8-Jun-2000, Publisher="Altium Limited", Supplier 1=Digi-Key
R10: library part Res1, "Resistor", Supplier Part Number 1=RNCP1206FTD511RCT-ND, LatestRevisionDate=17-Jul-2002, LatestRevisionNote="Re-released for DXP Platform.", PackageDescription="Axial Device, Thru-Hole; 2 Leads; 0.3 in Pin Spacing", PackageReference=AXIAL-0.3, Published=8-Jun-2000, Publisher="Altium Limited", Supplier 1=Digi-Key
R19: library part Res1, "Resistor", Supplier Part Number 1=RG3216P-1004-B-T1, LatestRevisionDate=17-Jul-2002, LatestRevisionNote="Re-released for DXP Platform.", PackageDescription="Axial Device, Thru-Hole; 2 Leads; 0.3 in Pin Spacing", PackageReference=AXIAL-0.3, Published=8-Jun-2000, Publisher="Altium Limited", Supplier 1=Digi-Key
S1: Supplier Part Number 1=CKN9865-ND, Supplier 1=Digikey
Spr12CP: "Spare Fuse", Supplier Part Number 1=36-3568-ND, LatestRevisionDate=17-Jul-2002, LatestRevisionNote="Re-released for DXP Platform.", PackageDescription="Thru-Hole; 2 Leads", PackageReference=PIN-W2/E2.8, Published=8-Jun-2000, Publisher="Altium Limited", Supplier 1=Digi-Key, Supplier 2=Digi-Key
TSMS1: library part "Fuse 2", "Fuse 7.5A", Supplier Part Number 1=36-3568-ND, LatestRevisionDate=17-Jul-2002, LatestRevisionNote="Re-released for DXP Platform.", PackageDescription="Thru-Hole; 2 Leads", PackageReference=PIN-W2/E2.8, Published=8-Jun-2000, Publisher="Altium Limited", Supplier 1=Digi-Key, Supplier 2=Digi-Key
U7: library part Component_1, Supplier Part Number 1=102-1716-ND, Supplier 1=Digi-Key
U8: library part Component_1, Supplier Part Number 1=LM2940CT-5.0/NOPB-ND, Supplier 1=Digi-Key
X1: library part "Header 10X2A", "Header, 10-Pin, Dual row", LatestRevisionDate=17-Jul-2002, LatestRevisionNote="Re-released for DXP Platform.", Publisher="Altium Limited"

## Via types
v1: diameter 4, hole 4, Top Layer to Bottom Layer, 4 vias
v2: diameter 1.27, hole 0.711, Top Layer to Bottom Layer, 3 vias

## Nets (pads, with @x,y where several pads share a name; then routed paths per layer and width w, separated by ;. In a path a pad name is that pad's centre, name@x,y a point inside that pad or via, vN(x,y) a via of type N, cw(c..) or ccw(c..) an arc to the next point about the centre after c; other vN are vias at no path point)
AMSFlyback: D1.2 P6.6 P6.7 S1.1 | length 22.9
  Top Layer w1.6: D1.2@115.037,153.822 115.214,154 115.214,160.858 S1.1@116.967,162.611
  Top Layer w2: S1.1@117.551,163.398 117.551,171.571 117.54,171.56 P6.7 P6.6
AMSLED: P6.3 R5.2 | length 6.4
  Top Layer w1: P6.3 127.7,170.765 128.35,170.115 R5.2
AMSStatus: C3.2 P6.5 R2.1 S1.3 | length 39
  Top Layer w1: P6.5 122.62,169.52 120,166.9 120,159.7 122.25,157.45 123.486,157.45 C3.2 R2.1
  Bottom Layer w1.2: S1.3 122.62,173.496 P6.5
CPBRB: COIL1.2 EngFan1.2 ETB-D1.2 FPump1.2 IGN1.2 INJ1.2 MS1.2 MtrCtrl1.2 P7.3 P7.4 SDwn1.2 Sp1FET.2 Spr12CP.2 Start1.2 SUp1.2 TSMS1.2 | length 79.6
  Top Layer w4: Sp1FET.2@62.56,147.345 67.399,147.345 67.475,147.422 70.739,147.422 74.143,147.422 81.915,147.422 93.022,147.422 97.434,147.422 97.536,147.32 100.025,144.831 108.647,144.831 115.4,138.078 115.4,124.173 117.795,121.778 INJ1.2@123.327,121.778
CPBRBIN: P6.1 P6.2 X1.17 X1.20 | length 142.9
  Top Layer w2.54: 109.017,78.054 109.274,77.797 119.986,77.797 120.726,78.537
  Top Layer w3: X1.17 107.7,78.507 108.153,78.054
  Top Layer w4: X1.20@118.669,80.594 120.726,78.537 133.166,78.537 136.937,78.537 148.184,89.784 148.184,111.023 145.059,114.148 145.059,146.895 144.602,147.352 144.602,163.156 135.025,173.674 132.787,173.642 132.718,173.641 131.198,173.619
GND: C2.1 C4.1 C9.2 C10.2 C11.2 C12.2 D1.1 D2.1 P1.1 P1.2 P1.7 P1.8 P7.5 P7.6 Q6.3 R1.1 R3.1 R19.1 U7.2 U8.2 X1.14 X1.15 X1.16
IMDFlyback: D2.2 P7.1 P7.2 S1.6 | length 25.2
  Top Layer w3: D2.2 107.975,155.575 110.718,158.318 111.176,158.318 ; P7.2@108.3,174.1 P7.1 ; 109.19,172.83 109.186,172.826 109.186,160.308 111.176,158.318 ; S1.6 111.176,158.318
IMDLED: P6.8 R6.2 | length 7.6
  Top Layer w2: R6.2 112.55,169.35 115,171.8 P6.8
IMDStatus: C1.2 P6.4 R4.1 S1.4 | length 33.7
  Top Layer w1: P6.4@125.1,174.1 125.1,167.8 122.9,165.6 C1.2@128.295,165.6
  Bottom Layer w1.2: S1.4 121.9,162.616 121.9,167.5 125.16,170.76 P6.4
NetAMS-L1_1: AMS-L1.1 X1.1 | length 70.4
  Bottom Layer w2.54: AMS-L1.1@74.552,112.284 62.347,112.284 57.81,107.747 57.81,91.084 59.614,89.281 76.911,89.281 79.121,87.071 83.869,87.071 X1.1
  Bottom Layer w4: AMS-L1.1@74.552,112.284 AMS-L1.1@77.956,112.284
NetBrkLt1_1: BrkLt1.1 P2.2 | length 44
  Top Layer w1.5: P2.2 53.68,134.96 55.27,136.55 55.27,154.102 58.344,157.175 68.351,157.175 BrkLt1.1@72.06,160.884
  Top Layer w3: BrkLt1.1@72.034,160.909 BrkLt1.1@72.06,160.884
  Top Layer w4: BrkLt1.1@68.656,160.909 BrkLt1.1@72.034,160.909
NetBrkSol2_1: BrkSol2.1 P2.3 P2.4 | length 67.5
  Top Layer w2: P2.4@52.424,130.007 P2.4@52.5,130.007 ; P2.4@52.5,130 P2.4@52.5,130.007 ; 54.92,132.42 54.913,132.42 ; 58.395,136.652 58.395,135.902 54.913,132.42 ; P2.4@52.5,130.007 54.913,132.42 ; P2.4@52.5,130.007 P2.3 54.913,132.42
  Top Layer w3: 58.395,136.652 58.547,136.804 58.547,151.028 61.646,154.127 83.925,154.127 83.925,156.525 BrkSol2.1@88.3,160.9
  Top Layer w4: BrkSol2.1@84.5,160.9 BrkSol2.1@88.3,160.9
NetC1_1: C1.1 C2.2 | length 3
  Top Layer w2: C2.2 C1.1
NetC3_1: C3.1 C4.2 | length 4.1
  Top Layer w1: C3.1 C4.2@130.3,157.48
NetC9_1: C9.1 INST1.1 U7.1 | length 20.5
  Top Layer w2: INST1.1@86.004,111.633 86.004,114.404 86.818,115.218 C9.1 90.627,118.727 91.44,119.54 U7.1
  Bottom Layer w4: INST1.1@82.601,112.233 INST1.1@86.004,112.233
NetC10_1: C10.1 L2.1 U7.3 | length 25.7
  Top Layer w2: C10.1 94.259,117.959 96.52,120.22 U7.3 96.52,127.52 99,130 102.566,130 L2.1
NetC11_1: C11.1 L2.2 U8.1 | length 15.5
  Top Layer w2: C11.1 97.688,109.712 98.891,108.509 U8.1 100.813,110.613 102.1,111.9 103.615,111.9 L2.2
NetC12_1: C12.1 ETB1.2 SHFT1.2 SPD1.2 Spr5V.2 SUSP1.2 U8.3 | length 43.7
  Top Layer w2: Spr5V.2@95.5,103.606 95.677,103.429 U8.3 100.813,100.558 C12.1
  Top Layer w4: SUSP1.2@61.747,103.606 Spr5V.2@95.5,103.606
NetCOIL1_1: COIL1.1 X1.8 | length 62
  Top Layer w2: X1.8 111.2,86.257 112.878,87.935 139.635,87.935 143.942,92.242 143.942,107.409 COIL1.1@139.55,111.8
  Bottom Layer w4: COIL1.1@136.147,111.8 COIL1.1@139.55,111.8
NetCtrl_1: Ctrl.1 P2.1 | length 32.8
  Top Layer w2: P2.1 52.248,137.752 52.248,156.032 57.11,160.894 ; Ctrl.1@64.095,160.894 Ctrl.1@64.313,161.112
  Top Layer w4: 57.11,160.894 60.796,160.894 Ctrl.1@64.095,160.894
NetD9_1: D9.1 D10.2 K1.4 Q6.1 | length 22.6
  Top Layer w1: K1.4@122.158,138.655 125.515,138.655 132.8,145.94 132.8,147.3 ; D10.2 131.862,148.238 132.8,147.3 ; Q6.1 132.8,149.039 132.8,147.3
NetD9_2: D9.2 FPRly1.1 K1.3 R10.1 | length 60.2
  Top Layer w1: K1.3@129.355,138.655 129.355,139.055 134.2,143.9 134.2,145.94
  Top Layer w2: R10.1@121.92,145.821 121.92,143.12 119.1,140.3 119.1,137.1 120.3,135.9 126.6,135.9 K1.3@129.355,138.655
  Top Layer w3: FPRly1.1@99.857,154.6 105.283,149.174 118.567,149.174 R10.1@121.92,145.821
  Top Layer w4: FPRly1.1@96.196,154.7 FPRly1.1@99.6,154.7
NetD10_1: D10.1 R10.2 | length 4.3
  Top Layer w1: R10.2 125.073,145.538 D10.1
NetEngFan1_1: EngFan1.1 P2.7 | length 36.8
  Top Layer w2.2: P2.7 55.991,122.26 65.176,131.445 74.549,131.445 78.511,135.407 EngFan1.1@78.511,137.363
  Bottom Layer w4: EngFan1.1@78.511,137.363 EngFan1.1@81.915,137.363
NetETB1_1: ETB1.1 X1.3 | length 21.5
  Bottom Layer w1: ETB1.1@79.95,93.7 79.883,93.633 79.883,93.167 83.49,89.56 88.38,89.56 X1.3
  Bottom Layer w4: ETB1.1@77.216,93.726 ETB1.1@80.62,93.726
NetETB-D1_1: ETB-D1.1 X1.10 | length 14
  Bottom Layer w1.2: X1.10 120.371,86.411 ETB-D1.1@120.371,93.929
  Bottom Layer w4: ETB-D1.1@120.371,93.929 ETB-D1.1@123.774,93.929
NetFPump1_1: FPump1.1 K1.1 | length 30.6
  Bottom Layer w1.5: FPump1.1@102.006,135.052 FPump1.1@105.41,135.052
  Bottom Layer w3: FPump1.1@105.41,135.052 117.831,135.052 118.579,135.8 127.3,135.8 130.695,132.405 K1.1@130.908,132.405
NetIGN1_1: IGN1.1 X1.7 | length 48.1
  Top Layer w1.2: X1.7 107.7,106.405 109.398,108.102 124.349,108.102 IGN1.1@128.047,111.8
  Bottom Layer w4: IGN1.1@128.047,111.8 IGN1.1@131.45,111.8
NetINJ1_1: INJ1.1 X1.6 | length 44.5
  Top Layer w1.6: X1.6 104.2,107.705 106.985,110.49 118.837,110.49 INJ1.1@120.147,111.8
  Bottom Layer w4: INJ1.1@120.147,111.8 INJ1.1@123.55,111.8
NetK1_2: K1.2 X1.5 | length 59.6
  Bottom Layer w2.5: X1.5@100.686,83.998 100.686,91.262 103.81,94.386 103.81,104.673 109.169,110.033 112.801,110.033 115.189,112.42 115.189,127.94 119.654,132.405 K1.2@120.908,132.405
NetMS1_1: MS1.1 P1.5 | length 21.8
  Bottom Layer w2.5: MS1.1@139.655,140.97 144.9,136.265 144.9,130.5 147.74,127.66 P1.5
  Bottom Layer w4: MS1.1@135.6,140.97 MS1.1@139.07,140.97 ; MS1.1@139.655,140.97 MS1.1@139.903,140.97
NetMtrCtrl1_1: MtrCtrl1.1 X1.18 | length 44.6
  Bottom Layer w1.2: X1.18 111.2,78.932 113.005,77.127 130.848,77.127 136.322,82.601 MtrCtrl1.1@136.322,93.828
  Bottom Layer w4: MtrCtrl1.1@136.429,93.976 MtrCtrl1.1@139.832,93.976
NetP1_3: P1.3 R3.2 R4.2 | length 58.5
  Top Layer w0.6: R4.2@123.25,163 v2(125.6,163)
  Top Layer w2: R3.2@123.156,160.426 123.158,160.503 R4.2@123.2,162.7
  Bottom Layer w0.6: v2(125.6,163) 125.6,145.2 133.9,136.9 139.2,136.9 141.5,134.6 141.5,129 147.92,122.58 P1.3
NetP1_4: P1.4 R1.2 R2.2 | length 44
  Top Layer w0.6: v2(127.2,151.2) 127.3,151.2 128.2,152.1 R1.2@128.2,153.314
  Top Layer w1: R2.2 R1.2@128.2,153.314
  Bottom Layer w0.6: v2(127.2,151.2) 127.2,145.1 134.5,137.8 139.7,137.8 142.5,135 ; 142.5,135.2 142.5,135 ; P1.4 147.18,125.12 142.5,129.8 142.5,135
NetP1_6: P1.6 Q6.2 R19.2 | length 27.8
  Top Layer w1: Q6.2 137.107,148.641 R19.2 139.319,146.812 v2(139.802,146.329)
  Bottom Layer w1: v2(139.802,146.329) 143.231,146.329 147.2,142.36 147.2,132 P1.6
NetP2_5: P2.5 Sp1FET.1 | length 17.3
  Top Layer w2.2: P2.5 53.553,127.34 Sp1FET.1@62.306,136.093 ; Sp1FET.1@65.862,137.82 Sp1FET.1@66.167,137.516
  Bottom Layer w4: Sp1FET.1@62.763,137.516 Sp1FET.1@66.167,137.516
NetP2_6: P2.6 Start1.1 | length 27.8
  Top Layer w2.2: P2.6 54.696,124.8 64.16,134.264 69.113,134.264 70.917,136.068 Start1.1@70.917,137.338
  Bottom Layer w4: Start1.1@70.741,137.462 Start1.1@74.144,137.462
NetP2_8: P2.8 SUp1.1 | length 44.7
  Top Layer w1.6: P2.8 57.084,119.72 66.421,129.057 78.054,129.057 SUp1.1@86.436,137.439
  Bottom Layer w4: SUp1.1@86.493,137.512 SUp1.1@89.897,137.512
NetP2_9: P2.9 SDwn1.1 | length 57.1
  Top Layer w1.6: P2.9 57.82,117.18 67.361,126.721 89.662,126.721 94.132,131.191 SDwn1.1@94.132,137.414
  Bottom Layer w4: SDwn1.1@94.164,137.492 SDwn1.1@97.568,137.492
NetP2_10: P2.10 Spr5V.1 | length 61.1
  Top Layer w2: P2.10 52.5,105.259 59.766,97.993 91.745,97.993 Spr5V.1@96.012,93.726
  Bottom Layer w4: Spr5V.1@92.63,93.776 Spr5V.1@96.033,93.776
NetP7_7: P7.7 P7.8 RstCCT1.1 | length 29.5
  Top Layer w4: RstCCT1.1@76.606,160.96 RstCCT1.1@80.01,160.96
  Bottom Layer w3: RstCCT1.1@80.01,160.96 80.01,163.754 81.305,165.049 90.526,165.049 92.1,166.624 92.1,171.323 92.354,171.577 92.354,174 P7.7@94.9,174
NetR5_1: R5.1
NetR6_1: R6.1
NetSHFT1_1: SHFT1.1 X1.4 | length 19.3
  Bottom Layer w1: SHFT1.1@87.598,93.802 87.859,93.541 87.859,92.659 91.44,89.078 95.529,89.078 97.2,87.407 X1.4
  Bottom Layer w4: SHFT1.1@84.938,93.802 87.598,93.802 SHFT1.1@88.341,93.802
NetSPD1_1: SPD1.1 | length 3.4
  Bottom Layer w4: SPD1.1@69.609,93.649 SPD1.1@73.013,93.649
NetSpr12CP_1: Spr12CP.1 X1.19 | length 33.9
  Bottom Layer w1.2: X1.19 114.7,79.153 115.138,78.715 125.959,78.715 131.724,84.48 Spr12CP.1@131.724,93.828
  Bottom Layer w4: Spr12CP.1@128.351,93.9 Spr12CP.1@131.755,93.9
NetSUSP1_1: SUSP1.1 X1.12 | length 42.4
  Top Layer w2.2: SUSP1.1@64.45,93.7 64.45,84.877 71.196,78.13 88.544,78.13 90.2,79.786 X1.12
  Bottom Layer w4: SUSP1.1@61.656,93.7 SUSP1.1@65.06,93.7
NetTSMS1_1: TSMS1.1 X1.9 | length 13.6
  Bottom Layer w1.2: X1.9 114.7,92.475 TSMS1.1@116.053,93.828
  Bottom Layer w4: TSMS1.1@112.649,93.828 TSMS1.1@116.053,93.828
"RIGHT BRB": AMS-L1.2 BrkLt1.2 BrkSol2.2 Ctrl.2 FPRly1.2 INST1.2 RstCCT1.2 X1.11 X1.13 | length 16.9
  Top Layer w6: BrkSol2.2@85.293,170.84 87.198,170.84 90.78,167.259 93.543,167.259 96.196,164.606 FPRly1.2@99.6,164.606
pads on no net: X1.2 X1.30 X1.31
copper on no net:
  other v1: 54.8,80.2 146.8,80.2 54.8,172.2 146.8,172.2

## Polygon pours and split planes (outlines as drawn)
GND on Bottom Layer "Bottom Layer-GND" (solid, remove dead copper, pour order 16): 51.133,175.867 51.167,175.9 150.5,175.9 150.5,76.5 150.467,76.533 51.133,76.533
CPBRB on Bottom Layer "Bottom Layer-CPBRB" (solid, pour order 14): 102.034,175.87 106.5,175.87 106.5,148.468 107.493,146.9 107.493,139.802 99.7,139.802 99.7,150.6 102.034,152.934
CPBRB on Bottom Layer "CPBRB" (solid, pour order 10): 147.6,114.5 148.8,113.3 148.8,102.9 143.207,97.307 141.807,97.307 110.414,97.307 110.414,106.477 140.382,106.477 142.3,108.394 142.3,114.5 117.805,114.5 117.805,126.136 133.3,126.136 133.3,133.404 133.696,133.8 141.807,133.8 141.807,127.893 147.6,122.1
"RIGHT BRB" on Bottom Layer "RBRB" (solid, pour order 6): 55.883,111.099 60.7,115.916 60.7,116 88.2,116 88.2,125.6 65.809,125.6 58.5,132.976 58.5,167.31 89.891,167.31 89.891,176.2 50.8,176.2 50.8,76.5 88.2,76.5 88.221,76.479 95.555,76.479 95.555,82.347 91.999,82.347 91.999,79.121 88.5,79.121 88.5,82.474 77.2,82.474 77.2,84 77.3,84.1 75.3,86.1 59.306,86.1 55.806,89.599
GND on Top Layer "GND" (solid, remove dead copper, pour order 0): 51.097,176.197 150.97,176.197 150.97,76.197 50.97,76.197

## Keep-outs
Keep-Out Layer:
  the board outline again, w0.254

## Other copper
Multi-Layer:
  region: 137.236,66.51 131.712,66.51 127.965,62.763

## Silkscreen, mask and mechanical layers (free items; w line width, h text height)
Top Overlay:
  lines w0.254: 109.65,90.4 142.15,90.4 ; 109.652,90.551 109.652,94.488 109.652,106.852 117.297,114.497 117.297,127.3 142.24,127.3 142.24,94.4 142.24,90.399 ; 56.45,90.2 56.45,129.3 114.478,129.3 114.478,114.936 114.478,113.462 108.179,107.163 108.179,90.2 56.45,90.2
  text "RESET" at 110.134,162.433 h1.3 r90
  text "RBRB 12 In" at 55.982,152.679 h1.3 r90
  text "FPump" at 116.9,136.5 h1.3 r90
  text "CPBRB 12 In" at 59.4,135.7 h1.3 r90
  text "12V" at 70.3,115.7 h1.3 r90
  text "5VReg" at 58.6,95.7 h1.3 r90
  text "CPBRB / FOut" at 143,91.5 h1.3
  text "RBRB / FOut" at 102,91.1 h1.3
Drill Drawing:
  text ".LEGEND" at 155.88,81.28 h1.52
  text "Drill Drawing." at 155.3,78.7 h1.52

## Dimensions
50.8,76.2 to 150.8,76.2 on Mechanical 1
50.8,76.2 to 50.8,176.2 on Mechanical 1

## Text inside footprints (layer, text, board x,y; h text height)
U7: Top Overlay "12-6.5V / SMPS" at 88.9,117.983 h1.3